# Altium PCB LKS_Motor_0313.PcbDoc (part 2 of 4)
Units mil, origin at the board's own origin, x right, y up, seen from the top; angles counter-clockwise.
Board outline 4321.51 x 591.52 mil, 2 copper layers (Top Layer, Bottom Layer); 107 components, 73 nets, 326 pads, 213 vias.
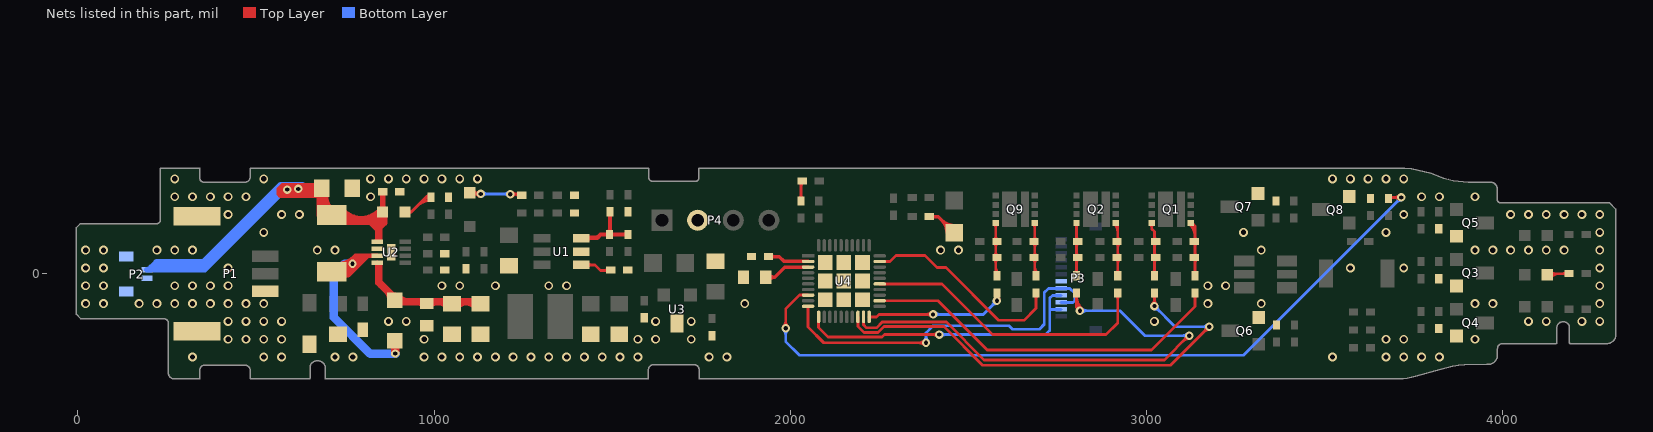
[diagram p2: the nets of this part, all layers, seen from the top]

## Via types
v1: diameter 25, hole 15, Top Layer to Bottom Layer, tented both sides, 139 vias
v2: diameter 23.62, hole 11.81, Top Layer to Bottom Layer, 74 vias

## Nets (pads, with @x,y where several pads share a name; then routed paths per layer and width w, separated by ;. In a path a pad name is that pad's centre, name@x,y a point inside that pad or via, vN(x,y) a via of type N, cw(c..) or ccw(c..) an arc to the next point about the centre after c; other vN are vias at no path point) (continued)
GND: C1.1 C2.1 C3.1 C4.2 C5.1 C6.1 C10.1 C11.1 C12.1 C14.1 C15.1 C23.1 C24.2 C25.1 C26.2 C27.1 C28.2 C29.1 DS1.2 FU1.1 P1.3 P1.4 P1.5 P2.1 P2.3 P2.4 P3.7 P4.2 Q3.2 Q4.2 Q5.2 Q6.2 Q7.2 Q8.2 R3.2 R9.2 R11.2 R15.1 R16.2 R30.2 R31.2 R35.2 R36.2 R37.2 R38.2 R46.2 R47.1 R49.2 U1.2 U2.2 U2.9 U3.3 U4.0 | length 502
  Top Layer w9.45: C27.1@2030,204 2030,256.44 R49.2@2033.56,260 ; R47.1@2390.06,160 2415,160 FU1.1@2460,115 ; 2030,219.74 ccw(c2042.74,219.74) 2033.73,210.73 cw(c2042.74,219.74) 2030,219.74 ; 2030,219.74 cw(c2017.26,219.74) 2026.27,210.73 ccw(c2017.26,219.74) 2030,219.74 ; 2405.8,160 ccw(c2405.8,147.26) 2396.79,156.27 cw(c2405.8,147.26) 2405.8,160 ; 2405.8,160 cw(c2405.8,172.74) 2396.79,163.73 ccw(c2405.8,172.74) 2405.8,160 ; 2425.39,149.61 ccw(c2460,184.23) 2460,135.28 cw(c2460,184.23) 2425.39,149.61 ; 2425.39,149.61 cw(c2390.77,115) 2439.72,115 ccw(c2390.77,115) 2425.39,149.61 ; FU1.1@2441.52,133.48 ccw(c2460,151.97) 2460,125.83 cw(c2460,151.97) FU1.1@2441.52,133.48 ; FU1.1@2441.52,133.48 cw(c2423.04,115) 2449.17,115 ccw(c2423.04,115) FU1.1@2441.52,133.48 ; R49.2@2026.83,256.27 cw(c2019.17,248.61) 2030,248.61 ccw(c2019.17,248.61) R49.2@2026.83,256.27 ; 2030,245.91 cw(c2044.64,245.91) 2034.29,256.27 ccw(c2044.64,245.91) 2030,245.91
  other v1: 322.04,-234.01 522.04,-234.01 572.04,-234.01 722.04,-234.01 772.04,-234.01 972.04,-234.01 1022.04,-234.01 1072.04,-234.01 1122.04,-234.01 1172.04,-234.01 1222.04,-234.01 1272.04,-234.01 1322.04,-234.01 1372.04,-234.01 1422.04,-234.01 1472.04,-234.01 1522.04,-234.01 1572.04,-234.01 1772.04,-234.01 1822.04,-234.01 3522.04,-234.01 3672.04,-234.01 3722.04,-234.01 3772.04,-234.01 3822.04,-234.01 422.04,-184.01 472.04,-184.01 522.04,-184.01 572.04,-184.01 972.04,-184.01 1572.04,-184.01 1622.04,-184.01 1722.04,-184.01 3672.04,-184.01 3722.04,-184.01 3922.04,-184.01 422.04,-134.01 472.04,-134.01 522.04,-134.01 572.04,-134.01 872.04,-134.01 922.04,-134.01 1622.04,-134.01 1722.04,-134.01 3022.04,-134.01 4072.04,-134.01 4122.04,-134.01 4222.04,-134.01 4272.04,-134.01 22.04,-84.01 72.04,-84.01 172.04,-84.01 222.04,-84.01 272.04,-84.01 322.04,-84.01 372.04,-84.01 422.04,-84.01 472.04,-84.01 522.04,-84.01 1872.04,-84.01 3172.04,-84.01 3322.04,-84.01 3922.04,-84.01 3972.04,-84.01 4272.04,-84.01 22.04,-34.01 72.04,-34.01 272.04,-34.01 322.04,-34.01 372.04,-34.01 422.04,-34.01 1022.04,-34.01 1072.04,-34.01 1172.04,-34.01 1322.04,-34.01 1372.04,-34.01 3172.04,-34.01 3222.04,-34.01 4272.04,-34.01 22.04,15.99 72.04,15.99 422.04,15.99 3572.04,15.99 3722.04,15.99 4272.04,15.99 22.04,65.99 72.04,65.99 222.04,65.99 272.04,65.99 322.04,65.99 672.04,65.99 722.04,65.99 2422.04,65.99 2472.04,65.99 3322.04,65.99 3922.04,65.99 3972.04,65.99 4022.04,65.99 4072.04,65.99 4122.04,65.99 4172.04,65.99 4272.04,65.99 522.04,115.99 3272.04,115.99 3672.04,115.99 4272.04,115.99 422.04,165.99 572.04,165.99 622.04,165.99 3722.04,165.99 4022.04,165.99 4072.04,165.99 4122.04,165.99 4172.04,165.99 4222.04,165.99 4272.04,165.99 272.04,215.99 322.04,215.99 372.04,215.99 422.04,215.99 472.04,215.99 822.04,215.99 3772.04,215.99 3822.04,215.99 3922.04,215.99 272.04,265.99 522.04,265.99 822.04,265.99 872.04,265.99 922.04,265.99 972.04,265.99 1022.04,265.99 1072.04,265.99 1122.04,265.99 3522.04,265.99 3572.04,265.99 3622.04,265.99 3672.04,265.99 3722.04,265.99
GREEN: R34.2 U4.8 | length 2419.8
  Top Layer w7.87: v2(1987,-153) 1987,-99 2025.76,-60.24 U4.8@2050,-60.24 ; R34.2@3679,211 3682,214 v2(3715,214) ; 1987,-133.99 ccw(c2006.01,-133.99) 1992.57,-147.43 cw(c2006.01,-133.99) 1987,-133.99 ; 1987,-133.99 cw(c1967.99,-133.99) 1981.43,-147.43 ccw(c1967.99,-133.99) 1987,-133.99 ; 3693.64,214 ccw(c3693.64,199.36) 3683.29,209.71 cw(c3693.64,199.36) 3693.64,214 ; 3693.64,214 cw(c3693.64,228.64) 3683.29,218.29 ccw(c3693.64,228.64) 3693.64,214 ; 3695.99,214 ccw(c3695.99,233.01) 3709.43,219.57 cw(c3695.99,233.01) 3695.99,214 ; 3695.99,214 cw(c3695.99,194.99) 3709.43,208.43 ccw(c3695.99,194.99) 3695.99,214
  Bottom Layer w7.87: v2(1987,-153) 1987,-190 2026,-229 3272,-229 v2(3715,214) ; 1987,-172.01 ccw(c1967.99,-172.01) 1981.43,-158.57 cw(c1967.99,-172.01) 1987,-172.01 ; 1987,-172.01 cw(c2006.01,-172.01) 1992.57,-158.57 ccw(c2006.01,-172.01) 1987,-172.01 ; 3701.56,200.56 ccw(c3688.12,214) 3707.13,214 cw(c3688.12,214) 3701.56,200.56 ; 3701.56,200.56 cw(c3715,187.12) 3715,206.13 ccw(c3715,187.12) 3701.56,200.56
HO1: R39.2 U4.29 | length 624.6
  Top Layer w7.87: U4.29@2250.79,34.25 2280.25,34.25 2297,51 2378,51 2411.89,17.11 2436.89,17.11 2585,-131 2656,-131 2690,-97 R39.2@2690,-54 ; 2690,-71.64 ccw(c2675.36,-71.64) 2685.71,-61.29 cw(c2675.36,-71.64) 2690,-71.64 ; 2690,-71.64 cw(c2704.64,-71.64) 2694.29,-61.29 ccw(c2704.64,-71.64) 2690,-71.64
HO2: R17.2 U4.25 | length 870.8
  Top Layer w7.87: U4.25@2250.79,-28.74 2425.74,-28.74 2568,-171 2886,-171 2919.06,-137.94 R17.2@2919.06,-54 ; 2919.06,-71.64 ccw(c2904.43,-71.64) 2914.78,-61.29 cw(c2904.43,-71.64) 2919.06,-71.64 ; 2919.06,-71.64 cw(c2933.7,-71.64) 2923.35,-61.29 ccw(c2933.7,-71.64) 2919.06,-71.64
HO3: R4.2 U4.22 | length 1076.8
  Top Layer w7.87: U4.22@2250.79,-75.98 2414.98,-75.98 2553,-214 3014,-214 3135.81,-92.19 R4.2@3135.81,-54 ; 3135.81,-71.64 ccw(c3121.17,-71.64) 3131.52,-61.29 cw(c3121.17,-71.64) 3135.81,-71.64 ; 3135.81,-71.64 cw(c3150.45,-71.64) 3140.1,-61.29 ccw(c3150.45,-71.64) 3135.81,-71.64
LH_OUT_01: P3.8 P3.10 U4.10 | length 1151.5
  Top Layer w7.87: U4.10@2050,-91.73 2050,-150 2094,-194 v2(2381,-194) ; 2361.99,-194 ccw(c2361.99,-174.99) 2375.43,-188.43 cw(c2361.99,-174.99) 2361.99,-194 ; 2361.99,-194 cw(c2361.99,-213.01) 2375.43,-199.57 ccw(c2361.99,-213.01) 2361.99,-194
  Bottom Layer w7.87: v2(2381,-194) 2381,-166 2401,-146 2614,-146 2624,-156 2699,-156 2713,-142 2713,-53 2724.74,-41.26 P3.8@2760,-41.26 2784.26,-41.26 2799,-56 2799,-75 2793.37,-80.63 P3.10@2760,-80.63 ; 2381,-174.99 ccw(c2400.01,-174.99) 2386.57,-188.43 cw(c2400.01,-174.99) 2381,-174.99 ; 2381,-174.99 cw(c2361.99,-174.99) 2375.43,-188.43 ccw(c2361.99,-174.99) 2381,-174.99
LH_OUT_02: P3.9 P3.11 U4.11 | length 946.4
  Top Layer w7.87: U4.11@2079.53,-121.26 2079.53,-151.26 2106.27,-178 2257,-178 2264,-171 v2(2418,-171) ; 2398.99,-171 ccw(c2398.99,-151.99) 2412.43,-165.43 cw(c2398.99,-151.99) 2398.99,-171 ; 2398.99,-171 cw(c2398.99,-190.01) 2412.43,-176.57 ccw(c2398.99,-190.01) 2398.99,-171
  Bottom Layer w7.87: v2(2418,-171) 2717,-171 2728,-160 2728,-104 ; v2@2423.57,-176.57 cw(c2437.01,-190.01) 2437.01,-171 cw(c2437.01,-151.99) v2@2423.57,-165.43 ; P3.11@2760,-100.31 2731.68,-100.31 2728,-104 ; P3.9@2760,-60.95 2736.05,-60.95 2728,-69 2728,-104
LO1: R41.2 U4.20 | length 684.4
  Top Layer w7.87: U4.20@2221.26,-121.26 2242,-121.26 2249,-114.26 v2(2400.74,-114.26) ; v2(2580,-76) R41.2@2580,-54 ; 2381.73,-114.26 ccw(c2381.73,-95.25) 2395.17,-108.69 cw(c2381.73,-95.25) 2381.73,-114.26 ; 2381.73,-114.26 cw(c2381.73,-133.27) 2395.17,-119.83 ccw(c2381.73,-133.27) 2381.73,-114.26 ; v2@2580,-71.64 ccw(c2565.36,-71.64) 2575.71,-61.29 cw(c2565.36,-71.64) v2@2580,-71.64 ; v2@2580,-71.64 cw(c2594.64,-71.64) 2584.29,-61.29 ccw(c2594.64,-71.64) v2@2580,-71.64 ; R41.2@2580,-56.99 ccw(c2599.01,-56.99) 2585.57,-70.43 cw(c2599.01,-56.99) R41.2@2580,-56.99 ; R41.2@2580,-56.99 cw(c2560.99,-56.99) 2574.43,-70.43 ccw(c2560.99,-56.99) R41.2@2580,-56.99
  Bottom Layer w7.87: v2(2400.74,-114.26) 2541.74,-114.26 v2(2580,-76) ; 2419.75,-114.26 ccw(c2419.75,-133.27) 2406.31,-119.83 cw(c2419.75,-133.27) 2419.75,-114.26 ; 2419.75,-114.26 cw(c2419.75,-95.25) 2406.31,-108.69 ccw(c2419.75,-95.25) 2419.75,-114.26 ; 2566.56,-89.44 ccw(c2553.12,-76) 2572.13,-76 cw(c2553.12,-76) 2566.56,-89.44 ; 2566.56,-89.44 cw(c2580,-102.88) 2580,-83.87 ccw(c2580,-102.88) 2566.56,-89.44
LO2: R22.2 U4.19 | length 1771.4
  Top Layer w7.87: U4.19@2205.51,-121.26 2205.51,-143.51 2214,-152 2242,-152 2258,-136 2438,-136 2544,-242 3050,-242 3118,-174 v2(3120,-174) ; R22.2@2803,-54 2803,-94 v2(2813,-104) ; 2803,-71.64 ccw(c2788.36,-71.64) 2798.71,-61.29 cw(c2788.36,-71.64) 2803,-71.64 ; 2803,-71.64 cw(c2817.64,-71.64) 2807.29,-61.29 ccw(c2817.64,-71.64) 2803,-71.64 ; v2(2813,-104) cw(c2837.14,-79.86) 2803,-79.86 ccw(c2837.14,-79.86) v2(2813,-104) ; R22.2@2803,-60.85 ccw(c2856.15,-60.85) 2818.57,-98.43 cw(c2856.15,-60.85) R22.2@2803,-60.85 ; 3103.14,-188.86 cw(c3120,-205.71) 3120,-181.87 ccw(c3120,-205.71) 3103.14,-188.86 ; 3107.97,-184.03 ccw(c3097.94,-174) 3112.13,-174 cw(c3097.94,-174) 3107.97,-184.03
  Bottom Layer w7.87: v2(2813,-104) 2925,-104 2995,-174 v2(3120,-174) ; 2832.01,-104 ccw(c2832.01,-123.01) 2818.57,-109.57 cw(c2832.01,-123.01) 2832.01,-104 ; 2832.01,-104 cw(c2832.01,-84.99) 2818.57,-98.43 ccw(c2832.01,-84.99) 2832.01,-104 ; 3100.99,-174 ccw(c3100.99,-154.99) 3114.43,-168.43 cw(c3100.99,-154.99) 3100.99,-174 ; 3100.99,-174 cw(c3100.99,-193.01) 3114.43,-179.57 ccw(c3100.99,-193.01) 3100.99,-174
LO3: R10.2 U4.18 | length 1616.6
  Top Layer w7.87: U4.18@2189.76,-121.26 2189.76,-147.76 2207,-165 2246,-165 2263,-148 2431,-148 2540,-257 3067,-257 3175,-149 v2(3176,-149) ; v2@3021.87,-90.87 R10.2@3021.87,-54 ; 3021.87,-71.64 ccw(c3007.24,-71.64) 3017.59,-61.29 cw(c3007.24,-71.64) 3021.87,-71.64 ; 3021.87,-71.64 cw(c3036.51,-71.64) 3026.16,-61.29 ccw(c3036.51,-71.64) 3021.87,-71.64 ; v2@3016.43,-85.43 ccw(c3003.29,-72.29) 3021.87,-72.29 cw(c3003.29,-72.29) v2@3016.43,-85.43 ; 3021.87,-71.69 ccw(c3041.31,-71.69) 3027.57,-85.43 cw(c3041.31,-71.69) 3021.87,-71.69 ; 3160.85,-163.15 cw(c3176,-178.3) 3176,-156.87 ccw(c3176,-178.3) 3160.85,-163.15 ; 3163.27,-160.73 ccw(c3151.53,-149) 3168.13,-149 cw(c3151.53,-149) 3163.27,-160.73
  Bottom Layer w7.87: v2(3022,-91) 3080,-149 v2(3176,-149) ; 3035.44,-104.44 ccw(c3022,-117.88) 3022,-98.87 cw(c3022,-117.88) 3035.44,-104.44 ; 3035.44,-104.44 cw(c3048.88,-91) 3029.87,-91 ccw(c3048.88,-91) 3035.44,-104.44 ; 3156.99,-149 ccw(c3156.99,-129.99) 3170.43,-143.43 cw(c3156.99,-129.99) 3156.99,-149 ; 3156.99,-149 cw(c3156.99,-168.01) 3170.43,-154.57 ccw(c3156.99,-168.01) 3156.99,-149
NetC1_2: C1.2 U1.1 | length 195.5
  Top Layer w7.87: U1.1@1413.12,24.6 1451.4,24.6 1467,9 1495,9 C1.2@1496,10 ; 1443.94,24.6 ccw(c1443.94,5.59) 1430.5,19.03 cw(c1443.94,5.59) 1443.94,24.6 ; 1443.94,24.6 cw(c1443.94,43.61) 1430.5,30.17 ccw(c1443.94,43.61) 1443.94,24.6 ; 1475.95,9 ccw(c1475.95,27.05) 1488.71,14.29 cw(c1475.95,27.05) 1475.95,9 ; 1480.78,9 cw(c1480.78,-2.22) 1488.71,5.71 ccw(c1480.78,-2.22) 1480.78,9
NetC3_2: C3.2 C4.1 D1.1 L2.2 P2.2 U2.1 | length 9784
  Top Layer w11.81: L2.2@699.84,178 L2.2@723,154.84 ; L2.2@723,142.84 853.55,142.84 ; 757.16,154.84 L2.2@723,154.84 ; 820,142.84 820.79,142.84 840.63,123 ; 831,142 844.66,142 855.53,152.87 ; U2.1@833.47,89.53 U2.1@840.63,89.53 ; 834,154.84 831,151.84 832.03,152.87 855.53,152.87 ; D1.1@855.53,172.87 864,164.39 864,143 850,129 850,119 ; 856,138.37 850,132.37 850,119 ; 856,210 856,153.34 ; C3.2@673.23,225.52 cw(c646.35,198.63) 684.37,198.63 ; C3.2@673.23,225.52 cw(c646.35,198.63) 684.37,198.63 ; C3.2@673.23,225.52 cw(c646.35,198.63) 684.37,198.63 ; C3.2@673.23,225.52 cw(c646.35,198.63) 684.37,198.63 ; 676,212.63 ccw(c702.26,212.63) 700.38,186.44 cw(c702.26,212.63) 676,212.63 ; 676,212.63 684.37,221 690.42,214.95 690.42,199 ; 676,212.63 676,163 684.16,154.84 L2.2@723,154.84 ; L2.2@683.52,180.15 ccw(c649.25,214.42) 697.71,214.42 cw(c649.25,214.42) L2.2@683.52,180.15 ; L2.2@683.52,180.15 ccw(c666.85,196.82) 690.42,196.82 cw(c666.85,196.82) L2.2@683.52,180.15 ; 684.37,198.63 cw(c722.39,198.63) C3.2@695.51,225.52 ; 684.37,198.63 cw(c722.39,198.63) C3.2@695.51,225.52 ; 684.37,198.63 cw(c722.39,198.63) C3.2@695.51,225.52 ; 684.37,198.63 cw(c722.39,198.63) C3.2@695.51,225.52 ; 684.37,208.69 ccw(c726.23,208.69) L2.2@704.04,173.19 ; 684.37,208.69 ccw(c726.23,208.69) L2.2@704.04,173.19 ; 684.37,208.69 ccw(c726.23,208.69) L2.2@704.04,173.19 ; 684.37,208.69 ccw(c726.23,208.69) L2.2@704.04,173.19 ; C3.2@684.37,230 ccw(c739.56,230) L2.2@710.3,183.2 ; C3.2@684.37,230 ccw(c739.56,230) L2.2@710.3,183.2 ; C3.2@684.37,230 ccw(c739.56,230) L2.2@710.3,183.2 ; C3.2@684.37,230 ccw(c739.56,230) L2.2@710.3,183.2 ; C3.2@684.37,230 C3.2@697.71,216.66 ; C3.2@684.37,230 684.37,170.37 699.9,154.84 L2.2@723,154.84 ; C3.2@684.37,230 684.37,193.47 686.42,191.42 L2.2@690.42,187.42 ; L2.2@690.42,187.42 690.42,199 ; L2.2@690.42,187.42 L2.2@723,154.84 ; 690.42,199 ccw(c703.2,199) 701.58,186.32 cw(c703.2,199) 690.42,199 ; 690.42,199 L2.2@697.71,191.71 ; 690.42,214.12 ccw(c683.63,214.12) 683.85,220.91 cw(c683.63,214.12) 690.42,214.12 ; 690.42,214.12 cw(c705.69,214.12) 695.19,225.22 ccw(c705.69,214.12) 690.42,214.12 ; C3.2@695.51,225.52 ccw(c707.78,213.24) 690.42,213.24 cw(c707.78,213.24) C3.2@695.51,225.52 ; C3.2@695.51,225.52 ccw(c742.6,178.43) 676,178.43 cw(c742.6,178.43) C3.2@695.51,225.52 ; L2.2@697.71,191.71 C3.2@697.71,216.66 ; L2.2@697.71,191.71 723,166.42 L2.2@723,154.84 ; C3.2@697.71,216.66 ccw(c746.4,216.66) 713.47,180.79 cw(c746.4,216.66) C3.2@697.71,216.66 ; L2.2@723,154.84 724.97,152.87 855.53,152.87 ; L2.2@723,154.84 853.55,154.84 855.53,152.87 ; L2.2@734.13,171.8 ccw(c804.05,241.71) 804.05,142.84 cw(c804.05,241.71) L2.2@734.13,171.8 ; L2.2@734.13,171.8 ccw(c779.85,217.51) 779.85,152.87 cw(c779.85,217.51) L2.2@734.13,171.8 ; L2.2@734.13,171.8 ccw(c775.08,212.74) 775.08,154.84 cw(c775.08,212.74) L2.2@734.13,171.8 ; L2.2@742.48,149.53 cw(c755.31,136.71) 755.31,154.84 ; L2.2@742.48,149.53 cw(c755.31,136.71) 755.31,154.84 ; L2.2@742.48,149.53 cw(c755.31,136.71) 755.31,154.84 ; L2.2@742.48,149.53 cw(c755.31,136.71) 755.31,154.84 ; L2.2@742.48,180.15 ccw(c832.56,270.23) 832.56,142.84 cw(c832.56,270.23) L2.2@742.48,180.15 ; L2.2@742.48,180.15 ccw(c808.36,246.03) 808.36,152.87 cw(c808.36,246.03) L2.2@742.48,180.15 ; L2.2@742.48,180.15 ccw(c803.59,241.26) 803.59,154.84 cw(c803.59,241.26) L2.2@742.48,180.15 ; U2.1@840.63,89.53 840.63,123 ; U2.1@840.63,89.53 850,98.9 850,107 850,119 ; 840.63,123 840.63,137.97 855.53,152.87 ; D1.1@848.57,179.82 ccw(c830.62,197.77) 856,197.77 cw(c830.62,197.77) D1.1@848.57,179.82 ; D1.1@848.57,179.82 cw(c783.48,244.91) 783.48,152.87 ccw(c783.48,244.91) D1.1@848.57,179.82 ; D1.1@848.57,179.82 cw(c788.25,240.14) 788.25,154.84 ccw(c788.25,240.14) D1.1@848.57,179.82 ; D1.1@849.52,165.07 cw(c840.13,152.87) 855.53,152.87 ; D1.1@849.52,165.07 cw(c840.13,152.87) 855.53,152.87 ; D1.1@849.52,165.07 cw(c840.13,152.87) 855.53,152.87 ; D1.1@849.52,165.07 cw(c840.13,152.87) 855.53,152.87 ; D1.1@849.52,165.07 cw(c840.13,152.87) 855.53,152.87 ; D1.1@849.52,165.07 cw(c840.13,152.87) 855.53,152.87 ; 855.53,152.87 cw(c870.92,152.87) D1.1@861.53,165.07 ; 855.53,152.87 cw(c870.92,152.87) D1.1@861.53,165.07 ; 855.53,152.87 cw(c870.92,152.87) D1.1@861.53,165.07 ; 855.53,152.87 cw(c870.92,152.87) D1.1@861.53,165.07 ; 855.53,152.87 cw(c870.92,152.87) D1.1@861.53,165.07 ; 855.53,152.87 cw(c870.92,152.87) D1.1@861.53,165.07 ; 855.53,152.87 856,153.34 ; 856,153.34 ccw(c842.2,153.34) 849.98,164.73 cw(c842.2,153.34) 856,153.34 ; 856,153.34 cw(c871.2,153.34) 861.69,165.19 ccw(c871.2,153.34) 856,153.34 ; D1.1@856.92,171.47 cw(c811.99,216.4) 811.99,152.87 ccw(c811.99,216.4) D1.1@856.92,171.47 ; D1.1@856.92,171.47 cw(c816.76,211.63) 816.76,154.84 ccw(c816.76,211.63) D1.1@856.92,171.47 ; D1.1@865.27,163.12 cw(c840.51,187.88) 840.51,152.87 ccw(c840.51,187.88) D1.1@865.27,163.12 ; D1.1@865.27,163.12 cw(c845.28,183.11) 845.28,154.84 ccw(c845.28,183.11) D1.1@865.27,163.12 ; L2.2@676,187.25 ccw(c700.44,187.25) 698.69,162.88 cw(c700.44,187.25) L2.2@676,187.25 ; 676,199.94 ccw(c701.35,199.94) 699.53,174.66 cw(c701.35,199.94) 676,199.94 ; 676,206.94 cw(c714.08,206.94) 687.15,233.87 ccw(c714.08,206.94) 676,206.94 ; 676,211.21 cw(c685.73,211.21) 685.21,220.93 ccw(c685.73,211.21) 676,211.21 ; C3.2@676.38,223.08 cw(c661.91,198.52) 690.42,198.52 ccw(c661.91,198.52) C3.2@676.38,223.08 ; C3.2@677.38,222.54 cw(c661.14,189.77) 697.71,189.77 ccw(c661.14,189.77) C3.2@677.38,222.54 ; C3.2@682.62,233.13 cw(c670.57,208.81) 697.71,208.81 ccw(c670.57,208.81) C3.2@682.62,233.13 ; L2.2@686.06,191.78 ccw(c698.83,204.55) 698.83,186.49 cw(c698.83,204.55) L2.2@686.06,191.78 ; 687.66,201.76 cw(c670.14,184.23) 690.67,170.35 ccw(c670.14,184.23) 687.66,201.76 ; L2.2@717.43,155.1 ccw(c747.02,184.69) 747.02,142.84 cw(c747.02,184.69) L2.2@717.43,155.1 ; L2.2@725.78,163.45 ccw(c775.53,213.2) 775.53,142.84 cw(c775.53,213.2) L2.2@725.78,163.45 ; D1.1@850.77,164.25 cw(c838.38,141.82) 864,141.82 ccw(c838.38,141.82) D1.1@850.77,164.25 ; 856,195.48 ccw(c878.14,195.48) 862.48,179.82 cw(c878.14,195.48) 856,195.48
  Top Layer w15.75: 576,226 586,236 656,236 ; v2(588,236) 656,236 ; 622,221 631,221 ; C3.2@687.23,220 C3.2@690.8,223.57 ; C3.2@687.23,221 631,221 ; C4.1@856,230 856,208 856,189 ; 569,221 ccw(c569,287.23) v2@616.19,240.76 ; 569,221 ccw(c569,236.06) 584.06,236.01 cw(c569,236.06) 569,221 ; 569,221 ccw(c569,287.23) v2@616.19,240.76 ; 569,221 566,224 566,237 575,246 668.37,246 684.37,230 678.37,236 656,236 ; 569,221 631,221 ; 604.67,236 ccw(c604.67,252.33) v2@616.22,240.78 ; 604.67,236 ccw(c604.67,252.33) v2@616.22,240.78 ; 604.67,236 ccw(c604.67,252.33) v2@616.22,240.78 ; 604.67,236 ccw(c604.67,252.33) v2@616.22,240.78 ; v2@621.78,240.78 ccw(c633.33,252.33) 633.33,236 ; v2@621.78,240.78 ccw(c633.33,252.33) 633.33,236 ; v2@621.78,240.78 ccw(c633.33,252.33) 633.33,236 ; v2@621.78,240.78 ccw(c633.33,252.33) 633.33,236 ; 631,221 ccw(c631,270.32) 672.72,244.01 cw(c631,270.32) 631,221 ; 631,221 cw(c631,275.35) 590.9,238.66 ccw(c631,275.35) 631,221 ; 649.53,236 ccw(c649.53,271.5) C3.2@674.63,246.4 ; 649.53,236 ccw(c649.53,271.5) C3.2@674.63,246.4 ; 649.53,236 ccw(c649.53,271.5) C3.2@674.63,246.4 ; 649.53,236 ccw(c649.53,271.5) C3.2@674.63,246.4 ; 652.68,236 cw(c652.68,204.96) C3.2@674.63,226.91 ; 652.68,236 cw(c652.68,204.96) C3.2@674.63,226.91 ; 652.68,236 cw(c652.68,204.96) C3.2@674.63,226.91 ; 652.68,236 cw(c652.68,204.96) C3.2@674.63,226.91 ; 656,236 ccw(c656,257.32) C3.2@673.23,244.77 ; 656,236 cw(c656,212.56) C3.2@673.87,227.73 ; 656,236 ccw(c656,257.32) C3.2@673.23,244.77 ; 656,236 cw(c656,212.56) C3.2@673.87,227.73 ; 656,236 ccw(c656,257.32) C3.2@673.23,244.77 ; 656,236 cw(c656,212.56) C3.2@673.87,227.73 ; 656,236 ccw(c656,257.32) C3.2@673.23,244.77 ; 656,236 cw(c656,212.56) C3.2@673.87,227.73 ; 656,236 ccw(c656,257.32) C3.2@673.23,244.77 ; 656,236 cw(c656,212.56) C3.2@673.87,227.73 ; 656,236 ccw(c656,257.32) C3.2@673.23,244.77 ; 656,236 cw(c656,212.56) C3.2@673.87,227.73 ; 856,189 ccw(c869.42,189) 860.66,178.83 cw(c869.42,189) 856,189 ; 856,189 cw(c844.11,189) 850.98,179.29 ccw(c844.11,189) 856,189 ; 579.29,228.03 ccw(c595.24,242.63) 595.24,221 cw(c595.24,242.63) 579.29,228.03 ; 584.8,221 ccw(c584.8,236.01) 599.81,235.96 cw(c584.8,236.01) 584.8,221 ; v2@590.18,246 cw(c590.18,209.18) 616.22,235.22 ccw(c590.18,209.18) v2@590.18,246 ; v2@590.78,233.22 cw(c621.65,202.35) 621.65,246 ccw(c621.65,202.35) v2@590.78,233.22 ; 606.61,221 ccw(c606.61,250.2) 627.42,229.71 cw(c606.61,250.2) 606.61,221 ; v2@621.78,235.22 cw(c647.82,209.18) 647.82,246 ccw(c647.82,209.18) v2@621.78,235.22 ; 644.7,246 cw(c644.7,203.67) 674.63,233.6 ccw(c644.7,203.67) 644.7,246 ; 657.51,246 ccw(c657.51,270.21) 674.63,253.09 cw(c657.51,270.21) 657.51,246 ; 659.56,221 ccw(c659.56,252.31) 686.03,235.6 cw(c659.56,252.31) 659.56,221 ; D1.1@849.96,178.43 ccw(c835.37,193.02) 856,193.02 cw(c835.37,193.02) D1.1@849.96,178.43 ; 856,190.73 ccw(c873.39,190.73) 861.09,178.43 cw(c873.39,190.73) 856,190.73
  Bottom Layer w15.75: v2@591.3,233.86 cw(c621,214.61) 621,250 586,250 ; v2(619,238) 569,238 558,227 ; 631,230 628,227 558,227 ; 207,19 221,33 352,33 569,250 ; 207,19 350,19 558,227 ; 207,19 198.87,10.87 P2.2@194.31,10.87 355.87,10.87 570,225 573,222 ; 558,227 ccw(c558,264.31) 585.14,238.7 cw(c558,264.31) 558,227 ; 569,250 cw(c569,234.91) 584.07,235.77 ccw(c569,234.91) 569,250 ; 569,250 586,250 ; 573,222 ccw(c573,281.09) 616.13,240.69 cw(c573,281.09) 573,222 ; 573,222 638,222 638,242 630,250 ; 586,250 cw(c586,211.81) v2@615.92,235.55 ; 586,250 cw(c586,211.81) v2@615.92,235.55 ; 586,250 cw(c586,211.81) v2@615.92,235.55 ; 586,250 cw(c586,211.81) v2@615.92,235.55 ; 586,250 630,250 ; v2@590.78,238.78 ccw(c631.3,279.3) 631.3,222 cw(c631.3,279.3) v2@590.78,238.78 ; v2@590.78,238.78 ccw(c619.23,267.23) 619.23,227 cw(c619.23,267.23) v2@590.78,238.78 ; 618.61,250 cw(c618.61,237.69) 628.25,245.34 ; 618.61,250 cw(c618.61,237.69) 628.25,245.34 ; 618.61,250 cw(c618.61,237.69) 628.25,245.34 ; 618.61,250 cw(c618.61,237.69) 628.25,245.34 ; 630,250 ccw(c630,195.8) 590.84,233.28 cw(c630,195.8) 630,250 ; P2.2@202.18,10.87 cw(c221.82,-8.76) 221.82,19 ccw(c221.82,-8.76) P2.2@202.18,10.87 ; 558.5,227.5 cw(c575.95,210.06) 586.34,232.43 ccw(c575.95,210.06) 558.5,227.5 ; 572.65,241.65 cw(c587.55,226.74) 588.57,247.8 ccw(c587.55,226.74) 572.65,241.65 ; 573.67,238 cw(c573.67,221.67) 585.22,233.22 ccw(c573.67,221.67) 573.67,238 ; 574.43,243.43 cw(c586.05,231.8) 592.98,246.71 ccw(c586.05,231.8) 574.43,243.43 ; 578.09,242.42 cw(c592.03,233.39) 592.03,250 ccw(c592.03,233.39) 578.09,242.42 ; 579.47,244.17 cw(c593.13,231.09) 593.13,250 ccw(c593.13,231.09) 579.47,244.17 ; 579.65,227.65 ccw(c593.28,241.28) 593.28,222 cw(c593.28,241.28) 579.65,227.65 ; v2@582.94,227 ccw(c582.94,274.06) 616.22,240.78 cw(c582.94,274.06) v2@582.94,227 ; 585.68,250 cw(c585.68,235.87) 599.79,236.68 ccw(c585.68,235.87) 585.68,250 ; v2@590.78,233.22 cw(c602.33,221.67) 602.33,238 ccw(c602.33,221.67) v2@590.78,233.22 ; 609.34,222 ccw(c609.34,247.05) 627.62,229.92 cw(c609.34,247.05) 609.34,222 ; 619.94,249.77 cw(c618.38,230.21) 638,230.21 ccw(c618.38,230.21) 619.94,249.77
NetC7_1: C7.1 R2.2 R5.1 U1.3 | length 312.7
  Top Layer w11.81: U1.3@1413.12,99.4 1414.72,101 1444,101 ; R2.2@1494,110 R5.1@1494,172 ; C7.1@1543,110 1520,110 1467,110 1458,101 ; 1444,101 1458,101 ; 1444,101 1458,101 ; U1.3@1429.1,95.23 cw(c1443.05,81.29) 1443.05,101 ccw(c1443.05,81.29) U1.3@1429.1,95.23 ; 1482.4,110 ccw(c1482.4,120.1) 1489.55,112.96 cw(c1482.4,120.1) 1482.4,110 ; R2.2@1489.55,115.96 ccw(c1478.79,126.71) 1494,126.71 cw(c1478.79,126.71) R2.2@1489.55,115.96 ; R2.2@1495.34,112.96 ccw(c1502.48,120.1) 1502.48,110 cw(c1502.48,120.1) R2.2@1495.34,112.96 ; 1533.96,110 ccw(c1533.96,120.1) 1541.1,112.96 cw(c1533.96,120.1) 1533.96,110
NetC9_2: C9.2 Q1.1 R4.1 R6.1 | length 512.9
  Top Layer w7.87: Q1.1@3124,146 3135.81,134.19 R4.1@3135.81,-6 ; 3135.81,11.64 ccw(c3150.45,11.64) 3140.1,1.29 cw(c3150.45,11.64) 3135.81,11.64 ; 3135.81,11.64 cw(c3121.17,11.64) 3131.52,1.29 ccw(c3121.17,11.64) 3135.81,11.64 ; Q1.1@3121.27,138.84 cw(c3086.18,103.74) 3135.81,103.74 ccw(c3086.18,103.74) Q1.1@3121.27,138.84 ; Q1.1@3126.84,144.4 cw(c3105.19,122.75) 3135.81,122.75 ccw(c3105.19,122.75) Q1.1@3126.84,144.4 ; R6.1@3132.71,40.71 cw(c3125.23,33.23) 3135.81,33.23 ccw(c3125.23,33.23) R6.1@3132.71,40.71 ; R6.1@3132.71,49.29 ccw(c3125.23,56.77) 3135.81,56.77 cw(c3125.23,56.77) R6.1@3132.71,49.29 ; C9.2@3132.71,85.71 cw(c3125.23,78.23) 3135.81,78.23 ccw(c3125.23,78.23) C9.2@3132.71,85.71 ; C9.2@3132.71,94.29 ccw(c3125.23,101.77) 3135.81,101.77 cw(c3125.23,101.77) C9.2@3132.71,94.29 ; 3135.81,27.49 cw(c3154.51,27.49) 3141.29,40.71 ccw(c3154.51,27.49) 3135.81,27.49 ; 3135.81,62.51 ccw(c3154.51,62.51) 3141.29,49.29 cw(c3154.51,62.51) 3135.81,62.51 ; 3135.81,72.49 cw(c3154.51,72.49) 3141.29,85.71 ccw(c3154.51,72.49) 3135.81,72.49 ; 3135.81,107.51 ccw(c3154.51,107.51) 3141.29,94.29 cw(c3154.51,107.51) 3135.81,107.51
NetC10_2: C10.2 C11.2 C12.2 D2.2 U2.4 | length 2447.2
  Top Layer w11.81: U2.4@840.63,30.47 840.63,7 840.63,-26.63 849,-35 ; 849,22.1 849,-22 ; 858.15,-44.15 849,-35 ; D2.2@880.46,-74.37 1012,-74.37 ; D2.2@885.46,-83 1014,-83 ; D2.2@909,-74.37 901.37,-74.37 872,-45 ; C10.2@1050,-74.37 1012,-74.37 ; C11.2@1130,-74.37 C11.2@1121.37,-83 ; 849,-35 849,-22 ; 849,-35 880.24,-66.24 880.24,-74.15 880.24,-53.24 872,-45 ; 849,-22 872,-45 ; D2.2@881.22,-54.22 cw(c867.17,-68.27) D2.2@886.42,-73.17 ; D2.2@881.22,-54.22 cw(c867.17,-68.27) D2.2@886.42,-73.17 ; D2.2@881.22,-54.22 cw(c867.17,-68.27) D2.2@886.42,-73.17 ; D2.2@881.22,-54.22 cw(c867.17,-68.27) D2.2@886.42,-73.17 ; D2.2@901.37,-63.01 ccw(c949.63,-14.75) 949.63,-83 cw(c949.63,-14.75) D2.2@901.37,-63.01 ; D2.2@901.37,-63.01 ccw(c928.8,-35.59) 928.8,-74.37 cw(c928.8,-35.59) D2.2@901.37,-63.01 ; C12.2@969.99,-90.56 ccw(c951.73,-108.82) 951.73,-83 cw(c951.73,-108.82) C12.2@969.99,-90.56 ; C12.2@969.99,-90.56 ccw(c930.9,-129.65) 930.9,-74.37 cw(c930.9,-129.65) C12.2@969.99,-90.56 ; 1012,-74.37 cw(c1012,-94.81) C10.2@1031.58,-88.91 ; 1012,-74.37 cw(c1012,-94.81) C10.2@1031.58,-88.91 ; 1012,-74.37 ccw(c1012,-96.03) 992.1,-87.49 cw(c1012,-96.03) 1012,-74.37 ; 1012,-74.37 cw(c1012,-94.81) C10.2@1031.58,-88.91 ; 1012,-74.37 cw(c1012,-94.81) C10.2@1031.58,-88.91 ; 1012,-74.37 C11.2@1112.74,-74.37 ; 1014,-83 ccw(c1014,-54.48) 1035.04,-73.74 cw(c1014,-54.48) 1014,-83 ; 1014,-83 cw(c1014,-106.95) 1033.7,-93.33 ccw(c1014,-106.95) 1014,-83 ; 1014,-83 C11.2@1121.37,-83 ; C11.2@1112.74,-74.37 ccw(c1112.74,-139.99) 1064.84,-95.13 cw(c1112.74,-139.99) C11.2@1112.74,-74.37 ; C11.2@1112.74,-74.37 C11.2@1121.37,-83 ; C11.2@1115.52,-95.51 ccw(c1085.33,-125.7) 1085.33,-83 cw(c1085.33,-125.7) C11.2@1115.52,-95.51 ; C11.2@1115.52,-95.51 ccw(c1064.49,-146.53) 1064.49,-74.37 cw(c1064.49,-146.53) C11.2@1115.52,-95.51 ; 859.78,-45.78 ccw(c890.24,-15.33) 890.24,-58.4 cw(c890.24,-15.33) 859.78,-45.78 ; 864.83,-50.83 cw(c841.52,-74.15) 874.49,-74.15 ccw(c841.52,-74.15) 864.83,-50.83 ; D2.2@893.02,-71.36 ccw(c921.12,-43.27) 921.12,-83 cw(c921.12,-43.27) D2.2@893.02,-71.36 ; D2.2@901.37,-85.28 cw(c927.72,-111.63) 927.72,-74.37 ccw(c927.72,-111.63) D2.2@901.37,-85.28 ; 954.64,-83 ccw(c954.64,-61.29) 969.99,-76.64 cw(c954.64,-61.29) 954.64,-83 ; 959.41,-74.37 cw(c959.41,-101.14) 978.34,-82.21 ccw(c959.41,-101.14) 959.41,-74.37 ; C12.2@990.01,-90.56 cw(c1008.27,-108.82) 1008.27,-83 ccw(c1008.27,-108.82) C12.2@990.01,-90.56 ; C12.2@990.01,-76.64 ccw(c1005.36,-61.29) 1005.36,-83 cw(c1005.36,-61.29) C12.2@990.01,-76.64 ; C10.2@1056.22,-87.06 cw(c1085.49,-114.48) 1085.49,-74.37 ccw(c1085.49,-114.48) C10.2@1056.22,-87.06 ; C10.2@1064.48,-95.51 cw(c1094.67,-125.7) 1094.67,-83 ccw(c1094.67,-125.7) C10.2@1064.48,-95.51 ; C10.2@1064.48,-73.23 ccw(c1088.06,-49.66) 1088.06,-83 cw(c1088.06,-49.66) C10.2@1064.48,-73.23 ; 1091.94,-83 ccw(c1091.94,-49.66) 1115.52,-73.23 cw(c1091.94,-49.66) 1091.94,-83 ; 1093.01,-74.37 cw(c1093.01,-118.02) 1123.87,-87.15 ccw(c1093.01,-118.02) 1093.01,-74.37
NetC13_2: C13.2 Q1.8 R10.1 R12.1 | length 419.6
  Top Layer w7.87: Q1.8@3014.42,146 3014.42,125.58 3021.87,118.13 3021.87,90 R10.1@3021.87,-6 ; 3014.42,131.05 ccw(c3003.4,131.05) 3011.19,138.84 cw(c3003.4,131.05) 3014.42,131.05 ; 3014.42,131.05 cw(c3025.43,131.05) 3017.64,138.84 ccw(c3025.43,131.05) 3014.42,131.05 ; 3021.87,11.64 ccw(c3036.51,11.64) 3026.16,1.29 cw(c3036.51,11.64) 3021.87,11.64 ; 3021.87,11.64 cw(c3007.24,11.64) 3017.59,1.29 ccw(c3007.24,11.64) 3021.87,11.64 ; R12.1@3018.59,40.71 cw(c3010.65,32.78) 3021.87,32.78 ccw(c3010.65,32.78) R12.1@3018.59,40.71 ; R12.1@3018.59,49.29 ccw(c3010.65,57.22) 3021.87,57.22 cw(c3010.65,57.22) R12.1@3018.59,49.29 ; C13.2@3018.59,85.71 cw(c3010.65,77.78) 3021.87,77.78 ccw(c3010.65,77.78) C13.2@3018.59,85.71 ; C13.2@3018.59,94.29 ccw(c3010.65,102.22) 3021.87,102.22 cw(c3010.65,102.22) C13.2@3018.59,94.29 ; 3021.87,27.95 cw(c3039.93,27.95) 3027.16,40.71 ccw(c3039.93,27.95) 3021.87,27.95 ; 3021.87,62.05 ccw(c3039.93,62.05) 3027.16,49.29 cw(c3039.93,62.05) 3021.87,62.05 ; 3021.87,72.95 cw(c3039.93,72.95) 3027.16,85.71 ccw(c3039.93,72.95) 3021.87,72.95 ; 3021.87,107.05 ccw(c3039.93,107.05) 3027.16,94.29 cw(c3039.93,107.05) 3021.87,107.05
NetC17_2: C17.2 Q2.1 R17.1 R18.1 | length 431.6
  Top Layer w7.87: Q2.1@2913,146 2919.06,139.94 R17.1@2919.06,-6 ; 2919.06,11.64 ccw(c2933.7,11.64) 2923.35,1.29 cw(c2933.7,11.64) 2919.06,11.64 ; 2919.06,11.64 cw(c2904.43,11.64) 2914.78,1.29 ccw(c2904.43,11.64) 2919.06,11.64 ; Q2.1@2910.27,138.84 cw(c2889.05,117.62) 2919.06,117.62 ccw(c2889.05,117.62) Q2.1@2910.27,138.84 ; R18.1@2915.71,40.71 cw(c2907.63,32.63) 2919.06,32.63 ccw(c2907.63,32.63) R18.1@2915.71,40.71 ; R18.1@2915.71,49.29 ccw(c2907.63,57.37) 2919.06,57.37 cw(c2907.63,57.37) R18.1@2915.71,49.29 ; C17.2@2915.71,85.71 cw(c2907.63,77.62) 2919.06,77.62 ccw(c2907.63,77.62) C17.2@2915.71,85.71 ; C17.2@2915.71,94.29 ccw(c2907.63,102.38) 2919.06,102.38 cw(c2907.63,102.38) C17.2@2915.71,94.29 ; 2919.06,28.1 cw(c2936.9,28.1) 2924.29,40.71 ccw(c2936.9,28.1) 2919.06,28.1 ; 2919.06,61.9 ccw(c2936.9,61.9) 2924.29,49.29 cw(c2936.9,61.9) 2919.06,61.9 ; 2919.06,73.1 cw(c2936.9,73.1) 2924.29,85.71 ccw(c2936.9,73.1) 2919.06,73.1 ; 2919.06,106.9 ccw(c2936.9,106.9) 2924.29,94.29 cw(c2936.9,106.9) 2919.06,106.9
NetC18_2: C18.2 Q2.8 R22.1 R26.1 | length 416.7
  Top Layer w7.87: R22.1@2803,-6 2803,90 2803,145.58 Q2.8@2803.42,146 ; 2803,11.64 ccw(c2817.64,11.64) 2807.29,1.29 cw(c2817.64,11.64) 2803,11.64 ; 2803,11.64 cw(c2788.36,11.64) 2798.71,1.29 ccw(c2788.36,11.64) 2803,11.64 ; R26.1@2799.71,40.71 cw(c2791.78,32.78) 2803,32.78 ccw(c2791.78,32.78) R26.1@2799.71,40.71 ; R26.1@2799.71,49.29 ccw(c2791.78,57.22) 2803,57.22 cw(c2791.78,57.22) R26.1@2799.71,49.29 ; C18.2@2799.71,85.71 cw(c2791.78,77.78) 2803,77.78 ccw(c2791.78,77.78) C18.2@2799.71,85.71 ; C18.2@2799.71,94.29 ccw(c2791.78,102.22) 2803,102.22 cw(c2791.78,102.22) C18.2@2799.71,94.29 ; Q2.8@2799.69,138.84 cw(c2791.7,130.85) 2803,130.85 ccw(c2791.7,130.85) Q2.8@2799.69,138.84 ; 2803,27.95 cw(c2821.05,27.95) 2808.29,40.71 ccw(c2821.05,27.95) 2803,27.95 ; 2803,62.05 ccw(c2821.05,62.05) 2808.29,49.29 cw(c2821.05,62.05) 2803,62.05 ; 2803,72.95 cw(c2821.05,72.95) 2808.29,85.71 ccw(c2821.05,72.95) 2803,72.95 ; 2803,107.05 ccw(c2821.05,107.05) 2808.29,94.29 cw(c2821.05,107.05) 2803,107.05 ; 2803,131.25 cw(c2813.73,131.25) 2806.14,138.84 ccw(c2813.73,131.25) 2803,131.25
NetC20_2: C20.2 Q9.1 R39.1 R40.1 | length 415.6
  Top Layer w7.87: Q9.1@2686,145 2686,-2 R39.1@2690,-6 ; 2686,131.05 ccw(c2674.98,131.05) 2682.77,138.84 cw(c2674.98,131.05) 2686,131.05 ; 2686,131.05 cw(c2697.02,131.05) 2689.23,138.84 ccw(c2697.02,131.05) 2686,131.05 ; C20.2@2682.71,40.71 cw(c2674.78,32.78) 2686,32.78 ccw(c2674.78,32.78) C20.2@2682.71,40.71 ; C20.2@2682.71,49.29 ccw(c2674.78,57.22) 2686,57.22 cw(c2674.78,57.22) C20.2@2682.71,49.29 ; R40.1@2682.71,85.71 cw(c2674.78,77.78) 2686,77.78 ccw(c2674.78,77.78) R40.1@2682.71,85.71 ; R40.1@2682.71,94.29 ccw(c2674.78,102.22) 2686,102.22 cw(c2674.78,102.22) R40.1@2682.71,94.29 ; 2686,21.29 ccw(c2714.29,21.29) 2694.29,1.29 cw(c2714.29,21.29) 2686,21.29 ; 2686,27.95 cw(c2704.05,27.95) 2691.29,40.71 ccw(c2704.05,27.95) 2686,27.95 ; 2686,62.05 ccw(c2704.05,62.05) 2691.29,49.29 cw(c2704.05,62.05) 2686,62.05 ; 2686,72.95 cw(c2704.05,72.95) 2691.29,85.71 ccw(c2704.05,72.95) 2686,72.95 ; 2686,107.05 ccw(c2704.05,107.05) 2691.29,94.29 cw(c2704.05,107.05) 2686,107.05
NetC21_2: C21.2 Q9.8 R41.1 R42.1 | length 411.8
  Top Layer w7.87: R41.1@2576.42,-2.42 Q9.8@2576.42,145 ; R41.1@2580,-6 R41.1@2580,-2.42 ; 2576.42,131.05 ccw(c2565.4,131.05) 2573.19,138.84 cw(c2565.4,131.05) 2576.42,131.05 ; 2576.42,131.05 cw(c2587.43,131.05) 2579.64,138.84 ccw(c2587.43,131.05) 2576.42,131.05 ; R42.1@2572.71,40.71 cw(c2563.77,31.77) 2576.42,31.77 ccw(c2563.77,31.77) R42.1@2572.71,40.71 ; R42.1@2572.71,49.29 ccw(c2563.77,58.23) 2576.42,58.23 cw(c2563.77,58.23) R42.1@2572.71,49.29 ; C21.2@2572.71,85.71 cw(c2563.77,76.77) 2576.42,76.77 ccw(c2563.77,76.77) C21.2@2572.71,85.71 ; C21.2@2572.71,94.29 ccw(c2563.77,103.23) 2576.42,103.23 cw(c2563.77,103.23) C21.2@2572.71,94.29 ; 2576.42,20.29 ccw(c2603.29,20.29) 2584.29,1.29 cw(c2603.29,20.29) 2576.42,20.29 ; 2576.42,28.95 cw(c2593.05,28.95) 2581.29,40.71 ccw(c2593.05,28.95) 2576.42,28.95 ; 2576.42,61.05 ccw(c2593.05,61.05) 2581.29,49.29 cw(c2593.05,61.05) 2576.42,61.05 ; 2576.42,73.95 cw(c2593.05,73.95) 2581.29,85.71 ccw(c2593.05,73.95) 2576.42,73.95 ; 2576.42,106.05 ccw(c2593.05,106.05) 2581.29,94.29 cw(c2593.05,106.05) 2576.42,106.05
NetC28_1: C28.1 U4.2 | length 155.1
  Top Layer w9.84: C28.1@1939.11,48.03 1968.97,48.03 1982.75,34.25 U4.2@2050,34.25 ; 1954.37,48.03 ccw(c1954.37,35.77) 1945.7,44.44 cw(c1954.37,35.77) 1954.37,48.03 ; 1954.37,48.03 cw(c1954.37,60.29) 1945.7,51.62 ccw(c1954.37,60.29) 1954.37,48.03
NetC29_2: C29.2 U4.3 | length 205.7
  Top Layer w7.87: C29.2@1931.3,-10 C29.2@1945,-10
  Top Layer w9.84: C29.2@1945,-10 1956,-10 ; U4.3@2050,18.5 1984.5,18.5 1956,-10 ; 1956,-10 ccw(c1956,-32.76) 1939.26,-17.34 cw(c1956,-32.76) 1956,-10 ; 1956,-10 cw(c1956,12.76) 1939.26,-2.66 ccw(c1956,12.76) 1956,-10
NetD1_2: D1.2 R1.2 | length 410.4
  Top Layer w7.87: D1.2@918.47,173.13 936.14,173.13 ; 950,187 942.5,179.5 ; R1.2@991,214.5 977.5,214.5 ; 936.13,173.13 ccw(c936.13,165.84) 929.39,168.62 cw(c936.13,165.84) 936.13,173.13 ; 936.13,173.14 cw(c936.13,180.43) 929.39,177.65 ccw(c936.13,180.43) 936.13,173.14 ; 936.14,173.13 942.5,179.5 ; 942.5,179.5 977.5,214.5 ; 977.5,214.5 ccw(c977.5,226.49) 986.47,218.53 cw(c977.5,226.49) 977.5,214.5 ; 977.5,214.5 cw(c977.5,202.52) 986.47,210.48 ccw(c977.5,202.52) 977.5,214.5 ; 952.49,189.49 cw(c991,150.98) 991,205.44 ccw(c991,150.98) 952.49,189.49 ; 965.93,202.93 cw(c991,177.86) 991,213.32 ccw(c991,177.86) 965.93,202.93 ; 970.76,207.76 cw(c980.24,198.27) 987.65,209.45 ccw(c980.24,198.27) 970.76,207.76 ; 977.57,214.57 cw(c985.67,206.46) 992,216.01 ccw(c985.67,206.46) 977.57,214.57 ; 979.37,216.37 cw(c991,204.75) 991,221.19 ccw(c991,204.75) 979.37,216.37
NetD2_1: D2.1 L2.1 U2.3 | length 3154.7
  Top Layer w11.81: L2.1@723,-4.84 724.16,-4.84 779.16,50.16 ; L2.1@723,-4.84 738.16,-4.84 793.16,50.16 ; L2.1@723,-4.84 L2.1@749.16,-4.84 ; L2.1@749.16,-4.84 759,-4.84 ; L2.1@749.16,-4.84 804.16,50.16 ; 759,-4.84 cw(c759,5.33) 748.83,5.28 ccw(c759,5.33) 759,-4.84 ; 759,-4.84 814,50.16 ; 761.02,18.02 ccw(c750.94,28.1) 765.19,28.1 cw(c750.94,28.1) 761.02,18.02 ; 761.02,18.02 cw(c771.1,7.94) v2@771.1,22.19 ; 761.02,18.02 cw(c771.1,7.94) v2@771.1,22.19 ; v2@771.1,22.19 ccw(c771.1,-25.86) 737.12,8.12 cw(c771.1,-25.86) v2@771.1,22.19 ; v2@771.1,34 ccw(c771.1,14.46) 757.28,28.28 cw(c771.1,14.46) v2@771.1,34 ; v2@771.1,34 ccw(c771.1,48.26) 781.18,38.18 ; v2@771.1,34 ccw(c771.1,74.82) 799.96,45.96 cw(c771.1,74.82) v2@771.1,34 ; v2@771.1,34 ccw(c771.1,48.26) 781.18,38.18 ; 779.16,50.16 ccw(c790.71,38.6) 776.31,30.89 cw(c790.71,38.6) 779.16,50.16 ; 779.16,50.16 814,50.16 ; 781.18,38.18 ccw(c791.26,28.1) 777.01,28.1 cw(c791.26,28.1) 781.18,38.18 ; 793.16,50.16 cw(c735.9,107.41) 729.02,26.74 ccw(c735.9,107.41) 793.16,50.16 ; 793.16,50.16 U2.3@840.63,50.16 814,50.16 ; 804.15,50.15 cw(c744.4,109.9) 730.69,26.53 ccw(c744.4,109.9) 804.15,50.15 ; 804.16,50.16 814,50.16 ; 814,50.16 cw(c751.24,112.91) 731.89,26.29 ccw(c751.24,112.91) 814,50.16 ; 814,50.16 cw(c774.75,89.41) 771.45,33.99 ccw(c774.75,89.41) 814,50.16 ; L2.1@724.17,-8.29 ccw(c734.59,38.39) 768.41,4.57 cw(c734.59,38.39) L2.1@724.17,-8.29 ; L2.1@724.94,-8.44 ccw(c730.61,26.07) 755.34,1.34 cw(c730.61,26.07) L2.1@724.94,-8.44 ; L2.1@726.74,3.24 ccw(c740.14,63.23) 783.61,19.76 cw(c740.14,63.23) L2.1@726.74,3.24 ; L2.1@726.85,3.22 ccw(c735.21,54.02) 771.61,17.61 cw(c735.21,54.02) L2.1@726.85,3.22 ; L2.1@727.01,3.2 ccw(c730.25,41.22) 757.24,14.24 cw(c730.25,41.22) L2.1@727.01,3.2 ; L2.1@727.17,15 ccw(c727.17,55.63) 755.9,26.9 cw(c727.17,55.63) L2.1@727.17,15 ; L2.1@727.17,26.81 ccw(c727.17,95.96) 776.07,47.07 cw(c727.17,95.96) L2.1@727.17,26.81 ; L2.1@728.01,14.97 ccw(c733.08,74.31) 775.2,32.2 cw(c733.08,74.31) L2.1@728.01,14.97 ; L2.1@728.77,14.87 ccw(c739.81,81.96) 787.88,33.88 cw(c739.81,81.96) L2.1@728.77,14.87 ; L2.1@729.32,14.77 ccw(c745.69,88.07) 798.8,34.96 cw(c745.69,88.07) L2.1@729.32,14.77 ; L2.1@742.48,-10.15 cw(c755.31,-22.97) 755.31,-4.84 ccw(c755.31,-22.97) L2.1@742.48,-10.15 ; L2.1@748.83,5.16 cw(c784.24,5.16) 759.2,30.2 ccw(c784.24,5.16) L2.1@748.83,5.16 ; L2.1@754.66,0.66 ccw(c729.13,26.19) 765.2,27.83 cw(c729.13,26.19) L2.1@754.66,0.66 ; 770.05,10.41 ccw(c770.57,19.25) 776.83,12.99 cw(c770.57,19.25) 770.05,10.41 ; v2@770.75,22.2 ccw(c772.66,54.33) 795.42,31.57 cw(c772.66,54.33) v2@770.75,22.2
  Top Layer w23.62: v2(891,-224) D2.1@891,-188.58 ; D2.1@883.28,-195.31 cw(c864.63,-213.95) 891,-213.95 ccw(c864.63,-213.95) D2.1@883.28,-195.31 ; 891,-210.27 cw(c912.16,-210.27) 897.2,-195.31 ccw(c912.16,-210.27) 891,-210.27
  Bottom Layer w23.62: v2(771.1,28.1) 749.1,28.1 719,-2 719,-123 821,-225 844,-225 ; 879,-225 844,-225 ; v2@892,-225 844,-225
NetD3_2: D3.2 R14.1 | length 493.9
  Top Layer w7.87: D3.2@1100,227.24 D3.2@1100.76,228 ; D3.2@1100.76,224 v2(1131,224) ; R14.1@1249,224 v2@1222,224 ; D3.2@1111.99,224 ccw(c1111.99,243.01) 1125.43,229.57 cw(c1111.99,243.01) D3.2@1111.99,224 ; D3.2@1111.99,224 cw(c1111.99,204.99) 1125.43,218.43 ccw(c1111.99,204.99) D3.2@1111.99,224 ; v2(1131,224) cw(c1131,251.63) 1109.28,234.55 ccw(c1131,251.63) v2(1131,224) ; v2@1222,224 cw(c1222,203.12) 1238.27,216.2 ccw(c1222,203.12) v2@1222,224 ; D3.2@1108.35,218.89 cw(c1120.68,206.56) 1120.68,224 ccw(c1120.68,206.56) D3.2@1108.35,218.89 ; v2@1219.57,217.43 cw(c1235.42,201.58) 1235.42,224 ccw(c1235.42,201.58) v2@1219.57,217.43 ; v2@1219.57,228.57 ccw(c1230.6,239.6) 1230.6,224 cw(c1230.6,239.6) v2@1219.57,228.57
  Bottom Layer w7.87: v2(1131,224) v2@1213,224 ; 1150.01,224 ccw(c1150.01,204.99) 1136.57,218.43 cw(c1150.01,204.99) 1150.01,224 ; 1150.01,224 cw(c1150.01,243.01) 1136.57,229.57 ccw(c1150.01,243.01) 1150.01,224 ; 1192.58,224 cw(c1192.58,201.58) 1208.43,217.43 ccw(c1192.58,201.58) 1192.58,224 ; 1197.4,224 ccw(c1197.4,239.6) 1208.43,228.57 cw(c1197.4,239.6) 1197.4,224
  other v2: 1214,223
NetD4_1: D4.1 R23.1 | length 224.5
  Top Layer w7.87: D4.1@4127.34,0 R23.1@4186,0 ; 4168.36,0 ccw(c4168.36,14.64) 4178.71,4.29 cw(c4168.36,14.64) 4168.36,0 ; 4168.36,0 cw(c4168.36,-14.64) 4178.71,-4.29 ccw(c4168.36,-14.64) 4168.36,0 ; D4.1@4127.26,-5.65 cw(c4140.9,-19.29) 4140.9,0 ccw(c4140.9,-19.29) D4.1@4127.26,-5.65 ; D4.1@4132.83,-11.22 cw(c4159.91,-38.3) 4159.91,0 ccw(c4159.91,-38.3) D4.1@4132.83,-11.22 ; D4.1@4132.83,5.49 ccw(c4146.07,18.73) 4146.07,0 cw(c4146.07,18.73) D4.1@4132.83,5.49